# EAGLE board gpn-badge (EAGLE 8.2.0)
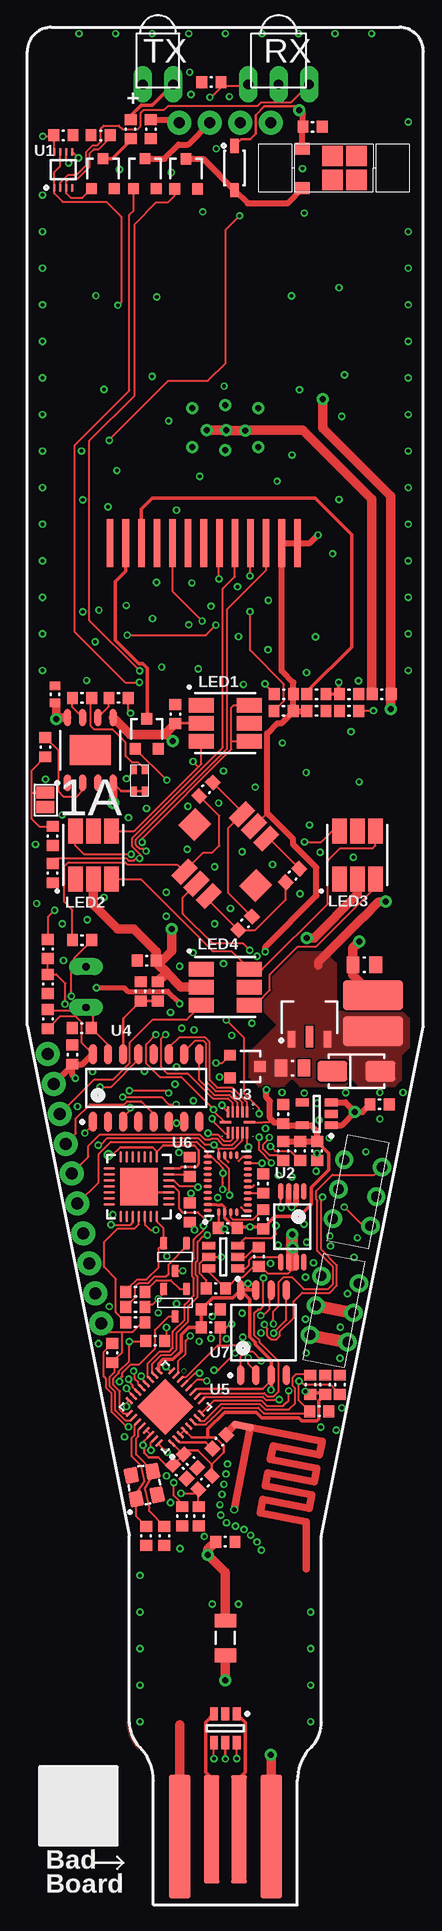
[diagram p0: board, top side]
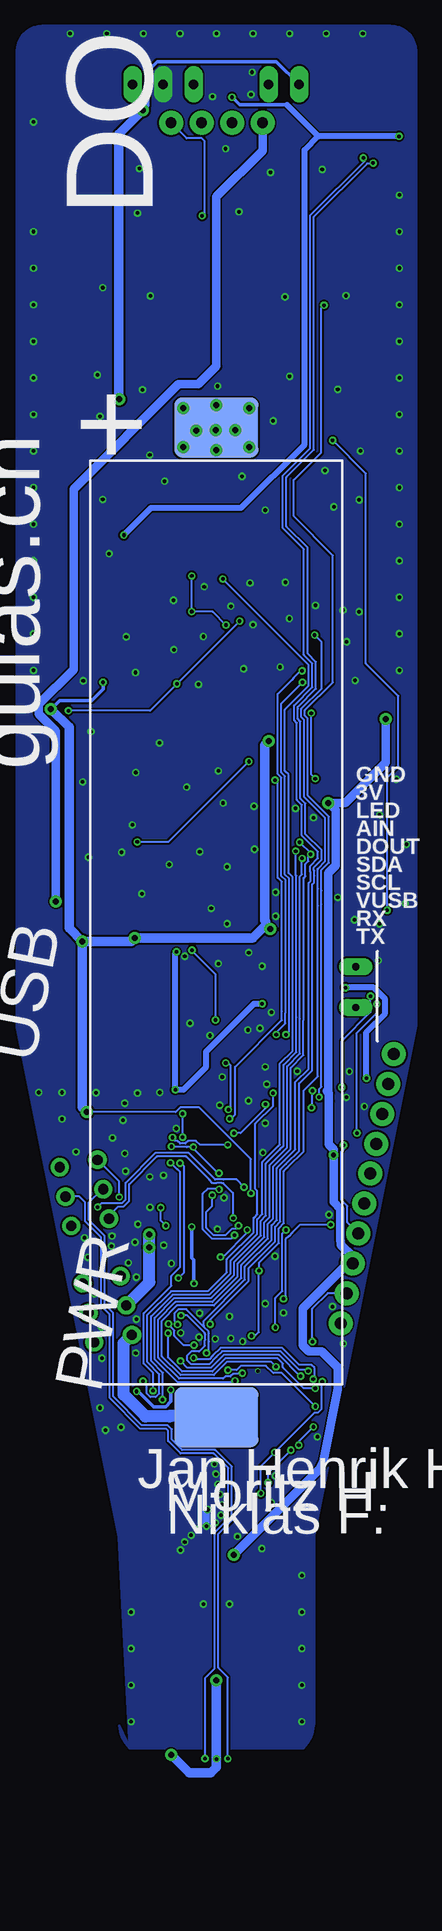
[diagram p1: board, bottom side, seen from below]

No outline drawn. Coordinates in mm, seen from the top.
Copper layers (1*16): Top 0.035mm / dielectric 1.5mm / Bottom 0.035mm
Design rules "gpn-badge": minimum track width 6mil, minimum drill 0.35mm, track to track 6mil, track to pad 6mil, pad to pad 6mil, via to via 6mil, smd to smd 6mil, copper to edge 40mil, drill to drill 6mil, minimum pad ring 0mil, minimum via ring 0mil, stop-mask expansion 4mil, vias tented up to drill 0mil, thermal gap 10mil

## Footprints (pad centres in the part's own frame; a part is rotated, then mirrored left to right if it is on the bottom)
ESP8266_ANT_1PRIMARY = smd 1.905 x 0.635 rotated 349: 1 -0.398,5.031 | drill 0.406 pad 0.635: 2 -1.108,-1.947
18650HOLDER-SMD_1PRIMARY = smd 7 x 5: 4 0,41.25; 5 0,-41.25
JOYSTICK_1PRIMARY = smd 2 x 1.1: 3 -3.39,1.43; 4 -3.39,0; 5 -3.39,-1.43; 6 3.39,1.43; 7 3.39,0; 8 3.39,-1.43 | smd 2 x 1.9: 9 0,3.6; 10 0,-3.6
C-0603-M_1PRIMARY = smd 0.9 x 1: 1 -0.8,0; 2 0.8,0
C-0603-M_3PRIMARY = smd 0.9 x 1: 1 -0.8,0; 2 0.8,0
C-0603-M_5PRIMARY = smd 0.9 x 1: 1 -0.8,0; 2 0.8,0
C-0603-M_4PRIMARY = smd 0.9 x 1: 1 -0.8,0; 2 0.8,0
C-0603-M_2PRIMARY = smd 0.9 x 1: 1 -0.8,0; 2 0.8,0
C-0603-H_1PRIMARY = smd 0.7 x 0.9: 1 -0.7,0; 2 0.7,0
C-0805-M_1PRIMARY = smd 1.05 x 1.4: 1 -0.95,0; 2 0.95,0
SOD123_1PRIMARY = smd 1.2 x 0.7: 1 -1.85,0; 2 1.85,0
DIODE-SMA_1PRIMARY = smd 1.7 x 2.5: 1 0,2; 2 0,-2
P:EX79Y79D391 = drill 1 pad 2: 1 0,0
EF59X39TOP1 = smd 1.5 x 1: 0 0,0
EF51X354TOP1 = smd 1.3 x 9: 0 0,0
EF70X406TOP1 = smd 1.778 x 10.3: 0 0,0
TL1838_1PRIMARY = drill 0.8 pad 1.524 long: 1 -2.54,0.254; 2 0,0.254; 3 2.54,0.254
SOT23-6_1PRIMARY = smd 1.1 x 0.65: 1 -1.2,0.95; 2 -1.2,0; 3 -1.2,-0.95; 4 1.2,-0.95; 5 1.2,0; 6 1.2,0.95
SOT89-150P409X160-3N_1PRIMARY = smd 1.4 x 0.6: 1 -1.8,1.5; 3 -1.8,-1.5 | smd 1.8 x 0.6: 2 -1.6,0
L_1PRIMARY = smd 2.5 x 5: 1 -1.5,0; 2 1.5,0
LCD_1PRIMARY = smd 0.55 x 4: 1 22.2,10; 2 20.9,10; 3 19.6,10; 4 18.3,10; 5 17,10; 6 15.7,10; 7 14.4,10; 8 13.1,10; 9 11.8,10; 10 10.5,10; 11 9.2,10; 12 7.9,10; 13 6.6,10
PLCC6_1PRIMARY = smd 2.1 x 1.2: 1 -2,1.5; 2 -2,0; 3 -2,-1.5; 4 2,-1.5; 5 2,0; 6 2,1.5
LEDDUO_1PRIMARY = smd 0.75 x 0.5: 1 2.2,1.2; 2 0.4,1.2; 3 2.2,0.3; 4 0.4,0.3
IR_LED_1PRIMARY = drill 0.8 pad 1.524 long: 1 -1.27,0.254; 2 1.27,0.254
VIBRATOR_SMD_1PRIMARY = smd 1.2 x 1: 1 8.9,0.4; 2 8.9,3.7 | smd 1.7 x 1.7: 3 4.4,3; 4 4.4,1; 5 6.4,3; 6 6.4,1
HDR1X4H_WO_SILK_1PRIMARY = drill 0.9 pad 2: 1 0,0; 2 2.54,0; 3 5.08,0; 4 7.62,0
AO-SOT23-3_V_1PRIMARY = smd 0.9 x 0.95: 1 -0.95,-1.25; 2 0.95,-1.25; 3 0,1.25
SOT23-3_1PRIMARY = smd 1 x 0.6: 2 -1.15,0.95; 3 -1.15,-0.95; 4 1.15,0
AO-SOT23-3_V_2PRIMARY = smd 0.9 x 0.95: 1 -0.95,-1.25; 2 0.95,-1.25; 3 0,1.25
SOP64P640X265-8N_1PRIMARY = smd 1.4 x 0.45: 1 -2.95,0.953; 2 -2.95,0.318; 3 -2.95,-0.318; 4 -2.95,-0.953; 5 2.95,-0.953; 6 2.95,-0.318; 7 2.95,0.318; 8 2.95,0.953
R-0603-M_1PRIMARY = smd 0.9 x 1: 1 -0.8,0; 2 0.8,0
R-0603-M_2PRIMARY = smd 0.9 x 1: 1 -0.8,0; 2 0.8,0
R-0603-M_4PRIMARY = smd 0.9 x 1: 1 -0.8,0; 2 0.8,0
LDR-5MM_1PRIMARY = drill 0.6 pad 1.397 long: 1 -1.7,0; 2 1.7,0
R-0603-M_3PRIMARY = smd 0.9 x 1: 1 -0.8,0; 2 0.8,0
R-1206-M_1PRIMARY = smd 1.15 x 1.8: 1 -1.45,0; 2 1.45,0
SWITCH_THT_1PRIMARY = drill 0.85 pad 1.524: 1 1.9,0.2; 2 4.4,0.2; 3 6.9,0.2; 4 6.9,3.4; 5 4.4,3.4; 6 1.9,3.4
DCU0008A_L_1PRIMARY = smd 0.6 x 0.25: 1 -1.5,0.75; 2 -1.5,0.25; 3 -1.5,-0.25; 4 -1.5,-0.75; 5 1.5,-0.75; 6 1.5,-0.25; 7 1.5,0.25; 8 1.5,0.75
BNO-055_1PRIMARY = smd 0.3 x 0.7: 1 -2.245,1.671; 6 -2.255,-1.671; 7 -1.755,-1.671; 8 -1.255,-1.671; 9 -0.755,-1.671; 10 -0.255,-1.671; 11 0.245,-1.671; 12 0.745,-1.671; 13 1.245,-1.671; 14 1.745,-1.671; 15 2.245,-1.671; 20 2.255,1.671; 21 1.755,1.671; 22 1.255,1.671; 23 0.755,1.671; 24 0.255,1.671; 25 -0.245,1.671; 26 -0.745,1.671; 27 -1.245,1.671; 28 -1.745,1.671 | smd 0.7 x 0.3: 2 -2.382,0.744; 3 -2.382,0.244; 4 -2.382,-0.256; 5 -2.382,-0.756; 16 2.368,-0.756; 17 2.368,-0.256; 18 2.368,0.244; 19 2.368,0.744
SON40P210X100-10N_1PRIMARY = smd 0.95 x 0.2: 1 -0.865,0.8; 2 -0.865,0.4; 3 -0.865,0; 4 -0.865,-0.4; 5 -0.865,-0.8; 7 0.865,-0.8; 8 0.865,-0.4; 9 0.865,0; 10 0.865,0.4; 11 0.865,0.8 | smd 0.2 x 0.95: 6 0,-1; 12 0,1
D0016A_M_1PRIMARY = smd 1.65 x 0.65: 1 -2.825,4.445; 2 -2.825,3.175; 3 -2.825,1.905; 4 -2.825,0.635; 5 -2.825,-0.635; 6 -2.825,-1.905; 7 -2.825,-3.175; 8 -2.825,-4.445; 9 2.825,-4.445; 10 2.825,-3.175; 11 2.825,-1.905; 12 2.825,-0.635; 13 2.825,0.635; 14 2.825,1.905; 15 2.825,3.175; 16 2.825,4.445
QFN32-5X5MM_1PRIMARY = smd 0.8 x 0.25: 1 -2.5,1.75; 2 -2.5,1.25; 3 -2.5,0.75; 4 -2.5,0.25; 5 -2.5,-0.25; 6 -2.5,-0.75; 7 -2.5,-1.25; 8 -2.5,-1.75; 17 2.5,-1.75; 18 2.5,-1.25; 19 2.5,-0.75; 20 2.5,-0.25; 21 2.5,0.25; 22 2.5,0.75; 23 2.5,1.25; 24 2.5,1.75 | smd 0.25 x 0.8: 9 -1.75,-2.5; 10 -1.25,-2.5; 11 -0.75,-2.5; 12 -0.25,-2.5; 13 0.25,-2.5; 14 0.75,-2.5; 15 1.25,-2.5; 16 1.75,-2.5; 25 1.75,2.5; 26 1.25,2.5; 27 0.75,2.5; 28 0.25,2.5; 29 -0.25,2.5; 30 -0.75,2.5; 31 -1.25,2.5; 32 -1.75,2.5 | smd 3.3 x 3.3: 33 0,0
SLAB-QFN-28-3125X3125TP_M_1PRIMARY = smd 0.95 x 0.2: 1 -2.475,1.5; 2 -2.475,1; 3 -2.475,0.5; 4 -2.475,0; 5 -2.475,-0.5; 6 -2.475,-1; 7 -2.475,-1.5; 15 2.475,-1.5; 16 2.475,-1; 17 2.475,-0.5; 18 2.475,0; 19 2.475,0.5; 20 2.475,1; 21 2.475,1.5 | smd 0.2 x 0.95: 8 -1.5,-2.475; 9 -1,-2.475; 10 -0.5,-2.475; 11 0,-2.475; 12 0.5,-2.475; 13 1,-2.475; 14 1.5,-2.475; 22 1.5,2.475; 23 1,2.475; 24 0.5,2.475; 25 0,2.475; 26 -0.5,2.475; 27 -1,2.475; 28 -1.5,2.475 | smd 3.13 x 3.13: 29 0,0
SOIC127P790X100-8N_1PRIMARY = smd 1.7 x 0.6: 1 -3.55,1.905; 2 -3.55,0.635; 3 -3.55,-0.635; 4 -3.55,-1.905; 5 3.55,-1.905; 6 3.55,-0.635; 7 3.55,0.635; 8 3.55,1.905
SOIC127P600X20_HS-9N_1PRIMARY = smd 1.45 x 0.6: 1 -2.725,1.905; 2 -2.725,0.635; 3 -2.725,-0.635; 4 -2.725,-1.905; 5 2.725,-1.905; 6 2.725,-0.635; 7 2.725,0.635; 8 2.725,1.905 | smd 2.5 x 3.4: 9 0,0
SOT23-5_1PRIMARY = smd 1.1 x 0.65: 1 -1.2,0.95; 2 -1.2,0; 3 -1.2,-0.95; 4 1.2,-0.95; 5 1.2,0.95
3225_1PRIMARY = smd 1.3 x 1.1: 1 -1,0.9; 2 1,0.9; 3 1,-0.9; 4 -1,-0.9

## Placement (x,y rotation side)
ANT1  ESP-ANTENNA  [ESP8266_ANT_1PRIMARY]  85.85,66.4 0 top
B1  18650-Holder  [18650HOLDER-SMD_1PRIMARY]  84,113.4 0 bottom
BTN1  joystick  [JOYSTICK_1PRIMARY]  84,119 45 top
C1  100n_25V  [C-0603-M_1PRIMARY]  77.45,110.21 0 top
C2  100n_25V  [C-0603-M_3PRIMARY]  91.26,179.71 180 top
C3  100n_25V  [C-0603-M_1PRIMARY]  79.83,130.76 270 top
C5  100n_25V  [C-0603-M_3PRIMARY]  91.65,94.34 90 top
C6  100n_25V  [C-0603-M_1PRIMARY]  94.31,131.02 0 top
C7  220p_50V  [C-0603-M_3PRIMARY]  93.55,74.86 90 top
C9  100n_25V  [C-0603-M_1PRIMARY]  72.04,104.58 0 top
C10  100n_25V  [C-0603-M_3PRIMARY]  87.15,91.62 270 top
C13  100n_25V  [C-0603-M_3PRIMARY]  92.31,74.86 270 top
C14  5.6p_50V  [C-0603-M_5PRIMARY]  83.5,70.1 45 top
C15  5.6p_50V  [C-0603-M_1PRIMARY]  77.4,62.26 90 top
C16  1u_10V  [C-0603-M_3PRIMARY]  84,61.78 180 top
C17  100n_25V  [C-0603-M_3PRIMARY]  81.05,93.02 270 top
C18  100n_25V  [C-0603-M_1PRIMARY]  84.2,87.91 0 top
C19  5.6p_50V  [C-0603-M_1PRIMARY]  78.92,62.26 90 top
C20  1u_10V  [C-0603-M_4PRIMARY]  88.83,97.41 270 top
C21  10u_6,3V  [C-0603-M_2PRIMARY]  81.1,68.5 135 top
C22  100n_25V  [C-0603-M_3PRIMARY]  80.2,67.6 135 top
C23  1u_10V  [C-0603-M_3PRIMARY]  82.78,81.13 180 top
C24  100n_25V  [C-0603-M_3PRIMARY]  91.59,131.02 180 top
C25  220p_50V  [C-0603-M_1PRIMARY]  81.8,63.9 90 top
C26  10u_6,3V  [C-0603-H_1PRIMARY]  69.8,132.4 270 top
C27  10u_6,3V  [C-0603-M_3PRIMARY]  94.31,132.41 180 top
C29  1u_10V  [C-0603-M_1PRIMARY]  96.85,98.22 180 top
C30  47u_6.3V  [C-0805-M_1PRIMARY]  95.58,109.86 180 top
C31  47u_6.3V  [C-0805-M_1PRIMARY]  89.59,101.25 0 top
C32  100n_25V  [C-0603-M_1PRIMARY]  70.5,179 180 top
C34  100n_25V  [C-0603-M_1PRIMARY]  82.83,183.44 0 top
C35  100n_25V  [C-0603-M_1PRIMARY]  71.25,102.36 270 top
C36  1u_10V  [C-0603-M_1PRIMARY]  77.8,179.51 90 top
D1  BAT54T1G  [SOD123_1PRIMARY]  84.76,176.28 90 top
D2  B230A-13-F  [DIODE-SMA_1PRIMARY]  94.92,100.99 270 top
D3  RB520S30T1G  [C-0603-M_3PRIMARY]  83.21,82.88 0 top
DUMMY1  [P:EX79Y79D391]  73.15,82.48 0 top
DUMMY2  [P:EX79Y79D391]  73.66,79.99 0 top
DUMMY3  [P:EX79Y79D391]  72.66,84.97 0 top
DUMMY4  [P:EX0Y0D1931]  88,162 0 top
DUMMY5  [P:EX0Y0D1931]  96,162 0 top
DUMMY6  [P:EX0Y0D1931]  96,170 0 top
DUMMY7  [P:EX0Y0D1931]  88,170 0 top
DUMMY8  [P:EX0Y0D1931]  72,162 0 top
DUMMY9  [P:EX0Y0D1931]  80,162 0 top
DUMMY10  [P:EX0Y0D1931]  80,170 0 top
DUMMY11  [P:EX0Y0D1931]  72,170 0 top
DUMMY12  [P:EX0Y0D1931]  80,58 0 top
DUMMY13  [P:EX0Y0D1931]  88,58 0 top
DUMMY14  [P:EX0Y0D1931]  88,49.95 0 top
DUMMY15  [P:EX0Y0D1931]  80,49.95 0 top
DUMMY16  [P:EX0Y0D2361]  72.5,183.5 0 top
DUMMY17  [P:EX0Y0D2361]  95.5,183.5 0 top
DUMMY18  [P:EX79Y79D391]  71.68,89.96 0 top
DUMMY19  [P:EX79Y79D391]  71.18,92.45 0 top
DUMMY20  [P:EX79Y79D391]  70.69,94.94 0 top
DUMMY21  [P:EX79Y79D391]  70.2,97.43 0 top
DUMMY22  [P:EX79Y79D391]  69.7,99.92 0 top
DUMMY23  [P:EX79Y79D391]  69.21,102.41 0 top
DUMMY24  [P:EX79Y79D391]  72.17,87.46 0 top
DUMMY25  [P:EX0Y0D1381]  97.94,176.28 0 top
DUMMY26  [P:EX0Y0D1381]  87.78,176.31 0 top
DUMMY27  [EF59X39TOP1]  69,124.2 0 top
DUMMY28  [EF59X39TOP1]  69,123 0 top
DUMMY29  [EF51X354TOP1]  85.14,37.8 0 top
DUMMY30  [EF51X354TOP1]  82.86,37.8 0 top
DUMMY31  [EF70X406TOP1]  87.81,37.2 0 top
DUMMY32  [EF70X406TOP1]  80.19,37.2 0 top
IC1  TL1838  [TL1838_1PRIMARY]  88.44,183 0 top
IC2  USBLC6-2SC6  [SOT23-6_1PRIMARY]  84,46.23 270 top
IC3  BL8530  [SOT89-150P409X160-3N_1PRIMARY]  91.01,105.46 90 top
L1  L  [L_1PRIMARY]  96.32,105.82 270 top
LCD1  LCD  [LCD_1PRIMARY]  67.8,135.01 0 top
LED1  WS2813  [PLCC6_1PRIMARY]  84,130 0 top
LED2  WS2813  [PLCC6_1PRIMARY]  73,119 90 top
LED3  WS2813  [PLCC6_1PRIMARY]  95,119 90 top
LED4  WS2813  [PLCC6_1PRIMARY]  84,108 0 top
LED5  DUO_LED  [LEDDUO_1PRIMARY]  76.07,126.54 270 top
LED6  IR_LED  [IR_LED_1PRIMARY]  78.39,183 0 top
M1  VIBRATOR  [VIBRATOR_SMD_1PRIMARY]  99.33,178.28 180 top
P1  Header_4H  [HDR1X4H_WO_SILK_1PRIMARY]  80.16,180.04 180 bottom
Q1  AO3400  [AO-SOT23-3_V_1PRIMARY]  80.72,175.8 0 top
Q2  AO3400  [AO-SOT23-3_V_1PRIMARY]  77.45,129.11 0 top
Q3  NPN_MMBT3904  [SOT23-3_1PRIMARY]  79.81,81.69 270 top
Q4  NPN_MMBT3904  [SOT23-3_1PRIMARY]  79.81,85.5 270 top
Q5  AO3400  [AO-SOT23-3_V_1PRIMARY]  73.8,175.8 0 top
Q6  AO3400  [AO-SOT23-3_V_2PRIMARY]  85.65,101.37 270 top
Q7  CEG8205  [SOP64P640X265-8N_1PRIMARY]  89.59,88.01 270 top
Q8  AO3400  [AO-SOT23-3_V_1PRIMARY]  77.3,175.8 0 top
R1  100k  [R-0603-M_1PRIMARY]  82.4,124.5 225 top
R2  100  [R-0603-M_2PRIMARY]  76.1,179.51 90 top
R3  12k  [R-0603-M_1PRIMARY]  88.88,132.41 180 top
R4  33  [R-0603-M_2PRIMARY]  91.59,132.41 0 top
R5  100k  [R-0603-M_4PRIMARY]  85.65,113.31 45 top
R6  100k  [R-0603-M_1PRIMARY]  89.6,117.3 225 top
R7  200k  [R-0603-M_1PRIMARY]  72.06,111.92 180 top
R8  100k  [R-0603-M_1PRIMARY]  91.82,72.65 180 top
R9  100k  [R-0603-M_2PRIMARY]  69.22,105.34 270 top
R10  12k  [R-0603-M_1PRIMARY]  73.61,179 0 top
R11  12k  [R-0603-M_1PRIMARY]  87.15,88.65 270 top
R12  330k  [R-0603-M_1PRIMARY]  78.39,107.65 90 top
R13  LDR  [LDR-5MM_1PRIMARY]  72.39,108 90 top
R14  330k  [R-0603-M_1PRIMARY]  69.22,111.18 90 top
R15  12k  [R-0603-M_1PRIMARY]  76.51,82.6 0 top
R16  12k  [R-0603-M_1PRIMARY]  76.51,81.33 180 top
R17  470  [R-0603-M_3PRIMARY]  78.16,78.51 179.6 top
R18  470  [R-0603-M_1PRIMARY]  76.51,80.06 0 top
R19  12k  [R-0603-M_1PRIMARY]  80.4,63.9 270 top
R20  1.2k  [R-0603-M_2PRIMARY]  82.78,79.63 180 top
R21  4k7  [R-0603-M_1PRIMARY]  88.85,131.02 180 top
R22  12k  [R-0603-M_2PRIMARY]  74.58,77.5 270 top
R23  12k  [R-0603-M_1PRIMARY]  91.09,74.86 90 top
R24  12k  [R-0603-M_1PRIMARY]  82.3,66.7 225 top
R25  12k  [R-0603-M_1PRIMARY]  69.6,117.5 90 top
R26  4k7  [R-0603-M_2PRIMARY]  90.22,94.34 270 top
R27  100  [R-0603-M_2PRIMARY]  81.05,89.21 90 top
R28  1.2k  [R-0603-M_2PRIMARY]  69,128 90 top
R29  1.2k  [R-0603-M_2PRIMARY]  69.6,120.6 90 top
R30  1.2k  [R-0603-M_1PRIMARY]  86.79,85.53 90 top
R31  0.27  [R-1206-M_1PRIMARY]  84,53.75 90 top
R32  4k7  [R-0603-M_2PRIMARY]  88.83,94.34 270 top
R33  1M  [R-0603-M_2PRIMARY]  76.94,107.65 270 top
R34  0  [R-0603-M_1PRIMARY]  97.03,132.41 0 top
R35  470  [R-0603-M_1PRIMARY]  72.06,132.11 0 top
R36  470  [R-0603-M_1PRIMARY]  75.1,132.1 0 top
R37  1M  [R-0603-M_2PRIMARY]  69.22,108.26 90 top
SW1  SWITCH_2P2T  [SWITCH_THT_1PRIMARY]  92.17,85.82 259 top
SW2  SWITCH_2P2T  [SWITCH_THT_1PRIMARY]  95.94,86.18 79 top
U1  74LVC2G125  [DCU0008A_L_1PRIMARY]  70.49,176.13 90 top
U2  BNO-055_I2C  [BNO-055_1PRIMARY]  84.2,91.62 90 top
U3  PCA9571  [SON40P210X100-10N_1PRIMARY]  85.02,96.73 270 top
U4  CD4051BM  [D0016A_M_1PRIMARY]  77.4,99.6 90 top
U5  ESP8266EX  [QFN32-5X5MM_1PRIMARY]  79,73 135 top
U6  CP2102-GM  [SLAB-QFN-28-3125X3125TP_M_1PRIMARY]  76.8,91.38 180 top
U7  W25Q64  [SOIC127P790X100-8N_1PRIMARY]  87.17,79.2 90 top
U8  TP4056  [SOIC127P600X20_HS-9N_1PRIMARY]  72.75,127.75 90 top
U9  DW01A  [SOT23-6_1PRIMARY]  83.82,85.5 180 top
U10  MIC5501-3.3V  [SOT23-5_1PRIMARY]  91.62,97.44 180 top
Y1  26MHz  [3225_1PRIMARY]  77.25,66.5 101 top

## Library data of the parts
ANT1 B1 BTN1 C1-C3 C5-C7 C9 C10 C13-C27 C29-C32 C34-C36 D1-D3 DUMMY1-DUMMY32 IC1-IC3 L1 LCD1 LED1-LED6 M1 P1 Q1-Q8 R1-R37 SW1 SW2 U1-U10 Y1 = gpn-badge

## Nets
ADC: C7.1 R8.2 U4.3
ALKSNS: R14.1 R37.2 U4.1
BATLVL: R12.1 R33.2 U4.14
EN: R23.2
ESP_RX: R17.2
ESP_TX: R18.2 R22.2
GND: ANT1.2 IC1.2
HSPI_CS_GPIO_15: R25.2
IN1: U4.5
IR_EN: U1.1 U1.7 U3.8
JOYSTK: R7.1 U4.13
LCD_LED: Q2.1 U3.7
LCD_RES: C6.2 LCD1.9 R3.2
MQ3_EN: Q6.1 Q8.1 U3.6
NETANT1_1: ANT1.1 C14.2
NETB1_1: R34.1
NETB1_2: SW1.3 SW1.4
NETC10_2: C10.2 U2.9
NETC14_1: C14.1
NETC15_2: C15.2 Y1.1
NETC19_2: C19.2 Y1.3
NETC31_1: C31.1 IC3.1 Q6.3
NETD1_1: D1.1 M1.2 Q1.3
NETD2_1: D2.1 IC3.3 L1.2
NETD3_1: D3.1 R27.1 U9.5
NETD3_2: D3.2 Q7.6 Q7.7 R30.1 SW1.2 SW1.5 U9.6
NETIC1_3: IC1.3 U1.2
NETJ2_1: R28.1 R29.2
NETLCD1_11: LCD1.11 R4.1
NETLCD1_12: LCD1.12 Q2.3
NETLED5_2: LED5.2 R35.2
NETLED5_4: LED5.4 R36.2
NETLED6_2: LED6.2 R2.1
NETQ3_1: Q3.2 R15.2
NETQ3_2: Q3.3
NETQ4_1: Q4.2 R16.2
NETQ5_1: Q5.1 R10.2 U1.3
NETQ5_3: Q5.3 R2.2
NETQ7_4: Q7.4 U9.3
NETQ7_5: Q7.5 U9.1
NETR11_1: R11.1 U2.4
NETR19_1: R19.1
NETR28_2: R28.2 U8.2
NETR30_2: R30.2 U9.2
NETR35_1: R35.1 U8.7
NETR36_1: R36.1 U8.6
NETU3_1: U3.1 U4.11
NETU3_2: U3.2 U4.10
NETU3_3: U3.3 U4.9
NETU5_20: U7.1
NETU5_21: U7.6
NETU5_22: U7.2
NETU5_23: U7.5
NRST: C25.2 Q3.4 R24.2
OUT1: U3.9
PCB_N: IC2.1
PCB_P: IC2.3
SCL: U3.10
SDA: U3.11
SER_N: SW2.1
SER_P: SW2.6
SW_N: IC2.6 SW2.2
SW_P: IC2.4 SW2.5
USB_N: R20.1 SW2.3 U1.6
USB_P: SW2.4 U1.5
VBAT: D1.2 LED6.1 M1.1
VBUS: LED5.1 LED5.3 U8.4 U8.8
VIBRATOR: Q1.1 U3.4
VUSB: IC2.5 R31.1

## Tracks (layer width: path | path; a pad name or v marks a point on that pad's centre or on a via)
5V  (via drill 0.5 pad 1)
  Top 0.5: 80.17,180.04 79.9,180.31 77.8,180.31
  Top 0.7: v97.39,115.14 96.8,115.14 95.48,113.82 95.48,113.84 91.75,110.11 91.75,109.81
  Bottom 0.7: v97.39,115.14 97.39,129.35 98.79,130.75 98.79,131.58 95.9,134.48 95.9,149.52 87.17,158.25 85.5,158.25 84,159.75 84,173.87 80.17,177.7 80.17,180.04
  pour Top (no thermals): 89.62,100.38 90.25,99.75 93.96,99.75 94.49,100.28 94.49,101.78 93.91,102.36 92.1,102.36 91.75,102.72 91.75,104.58 93.22,106.05 93.22,109.98 92.33,110.87 89.54,110.87 87.71,109.04 87.71,107.74 87.11,107.14 87.11,106.09 88.27,104.93 89.95,104.93 90.3,104.58 90.3,102.8 89.62,102.12
ADC  (via drill 0.3 pad 0.6)
  Top 0.15: C7.1 93.55,74.08 92.74,74.89 90.52,74.89 90.25,75.16 v90.13,75.16 v90.12,75.16 90.11,75.15 90.11,73.56 R8.2 90.86,72.49 87.2,72.49 86.75,72.94 83.78,72.94 82.85,72.01 82.38,71.53 81.63,71.53 81.61,71.55 | 93.14,73.7 93.5,74.06 | v79.28,99.17 79.07,99.37 v76,99.37 | v76.08,97.95 76.08,97.77 75.49,97.18 U4.3
  Bottom 0.15: v79.28,99.17 79.28,98.1 80.75,96.63 80.75,91.17 80.61,91.03 80.61,89.08 80.91,88.77 80.91,87.54 83.13,85.33 83.13,84.24 84.71,82.65 87.79,82.65 89.76,80.68 89.76,76.74 88.76,75.73 88.76,74.13 89.07,73.83 89.5,73.83 89.81,74.13 89.81,74.84 v90.13,75.16 | v76,99.37 76,98.02 v76.08,97.95
ALKSNS  (via drill 0.3 pad 0.6)
  Top 0.15: R14.1 R37.2 69.92,109.06 70.67,108.31 70.64,108.28 v70.64,106.58 | v72.29,95.84 72.95,96.5 U4.1
  Bottom 0.15: v72.29,95.84 72.29,104.19 70.64,105.85 v70.64,106.58
BATLVL
  Top 0.2: 75.49,102.17 U4.14 75.49,105.4 R33.2 R12.1
BNO_INT  (via drill 0.3 pad 0.6)
  Top 0.15: 85.87,93.36 85.92,93.36 | 85.92,93.36 87.01,93.36 v87.05,93.32 | 81.65,73.88 81.91,74.14 87.25,74.14 87.49,73.9 88.03,73.9 88.44,74.32 88.44,76.79 86.86,78.37 86.86,78.47 86.85,78.48 86.85,78.56 86.42,78.98 86.42,79.23 86.42,80.84 86.73,81.15 86.94,81.15 87.17,81.38 v87.17,83.75 | 85.87,93.31 85.92,93.36
  Bottom 0.15: v87.05,93.32 86.97,93.32 86.7,93.05 86.7,84.22 v87.17,83.75
EN
  Top 0.15: 81.65,72.12 81.93,71.83 82.25,71.83 82.55,72.13 82.55,72.14 83.66,73.25 86.87,73.25 87.33,72.79 89.28,72.79 89.81,73.31 89.81,74.57 89.61,74.77 89.61,75.46 89.9,75.76 91.09,75.76
ESP_RX  (via drill 0.3 pad 0.6)
  Top 0.15: 76,72.47 75.49,72.47 75.21,72.75 75.21,74.3 74.66,74.85 74.66,75.37 75.12,75.83 75.12,75.95 75.99,76.82 v75.99,78.45 77.04,78.45 77.36,78.77
  Bottom 0.15: v75.99,78.45 75.94,78.45 76,78.51 76,81.21 74.73,82.48 73.15,82.48
ESP_TX
  Top 0.15: 76.35,72.12 76.1,71.87 75.67,71.87 74.82,72.72 74.82,74.27 74.36,74.73 74.36,75.5 74.78,75.92 74.78,76.95 75.39,77.56 75.39,79.25 | 73.66,79.71 73.66,79.99 74.4,79.25 75.39,79.25 | 75.39,79.25 76.27,79.25 77.31,80.29
GND  (via drill 0.3 pad 0.4, 0.3 pad 0.6)
  Top 0.2: 84.22,97.59 84.22,97.6 83.72,98.09 v83.72,98.15 | 79.28,90.88 77.3,90.88 76.8,91.38 | 83.19,87.7 83.46,87.97 83.46,89.23 | 86.14,89.36 85.61,89.36 85.33,89.64 | 85.11,93.51 85.47,93.86 85.87,93.86 | 84.26,93.42 83.96,93.72 83.96,93.98 | 86.36,91.48 86.24,91.36 85.87,91.36
  Top 0.5: 89.27,90.96 89.27,89.98 89.35,89.91 89.35,89.83 v89.54,89.64 89.91,90.01 89.91,90.96
  Top 0.8: 80.19,37.11 80.19,46.51
  Bottom 0.635: ANT1.2 84.84,64.36 v84.84,63.07
  other vias: 80.88,123.07 86.64,110.57 91.9,119.23 93.7,72.93 93.58,79.66 92.71,87.25 90.78,86.75 75.59,70.51 79.07,113.9 79.07,115.9 74.96,151.06 72.01,152.68 72.11,148.62 72.11,139.27 73.15,136.78 73.89,115.47 70.51,110.21 70.41,113.29 72.49,113.62 68.28,114.96 68.18,119.89 70.4,122.35 75.92,122.13 83.44,123.35 83.11,118.04 84.43,114.56 83.11,113.29 90.22,115.78 85.4,119.28 87.94,118.22 94.67,118.83 95.15,125.1 90.73,125.89 94.46,129.29 91.01,121.52 88.75,128.35 86.49,124.67 83.85,126.01 72.44,133.56 78.69,134.67 81.74,134.52 85.5,133.23 87.56,136.12 85.09,137.21 91.52,137.19 90.76,134.22 92.94,144.12 81.21,141.69 82.81,139.75 80.95,138.21 77.93,138.71 73.46,139.42 74.22,148.04 79.94,147.76 93.93,159.03 93.7,155.58 89.56,152.35 81.87,150.58 90.17,157.79 83.9,158.09 79.28,155.2 73.89,157.81 77.9,158.91 73.2,165.64 78.28,165.54 89.51,165.61 93.47,166.3 90.58,172.52 90.43,176.23 81.03,184.26 81.13,182.4 84.33,182.22 75.19,176.15 82.12,172.62 79.5,175.9 83.24,177.88 95,87.1 94.72,85.47 94.19,82.45 91.65,94.14 88.42,92.31 89.56,92.18 91.57,92.66 95.71,94.26 98.81,99.22 96.88,97.01 96.88,99.22 94.03,99.19 91.65,98.33 90.58,99.17 88.72,99.22 83.52,100.51 84.53,103.97 80.19,109.73 79.94,101.35 79.43,105.9 81.38,104.42 80.37,104.58 72.93,100.97 77.27,100.99 79.94,96.65 80.14,94.21 74.63,89.03 73.43,78.29 78.41,80.85 79.94,81.61 82.81,78.72 93.25,71.07 91.95,71.33 86.64,61.75 86.11,62.31 84.18,68.25 84.05,67.42 83.87,66.55 83.72,65.71 83.54,64.85 83.62,63.99 84.1,63.35 81.31,110.88 83.85,109.96 86.21,104.98 71.68,98.05 73.18,98.81 79.81,99.9 81.33,98.53 92.76,86.41 91.34,85.02 90.55,88.24 83.36,90.45 83.92,87.84 69.01,125.33 87.58,140.24 85.02,141.38 78.26,141.73 88.32,150.17 93.47,148.64 95.1,133.53 79.43,65.03 80.83,119.48 80.22,61.19 82.91,56.57 85.09,56.57 87,61.07 79.1,67.26 99.24,180.11 74.86,187.48 71.81,187.48 96.19,187.48 93.14,187.48 90.1,187.48 87.05,187.48 84,187.48 80.95,187.48 77.9,187.48 99.24,134.39 99.24,137.44 99.24,140.49 99.24,143.54 99.24,146.59 99.24,149.63 99.24,152.68 99.24,155.73 99.24,158.78 99.24,161.83 99.24,164.87 99.24,167.92 99.24,170.97 68.76,164.87 68.76,167.92 68.76,170.97 68.76,174.02 68.76,149.63 68.76,152.68 68.76,155.73 68.76,158.78 68.76,161.83 68.76,134.39 68.76,137.44 68.76,140.49 68.76,143.54 68.76,146.59 91.11,46.76 91.11,49.81 91.11,52.86 91.11,55.91 76.89,58.96 76.89,55.91 76.89,52.86 76.89,49.81 76.89,46.76 80.55,76 79.12,85.58 74.33,81.38 90.68,83.82 93.55,77.07 81.82,78.46 85.4,80.83 90.73,77.5 86.97,79.17 82.91,80.55 85.45,78.83 84.1,78.68 90.68,80.32 85.55,62.79 82.25,62.21 91.8,96.91 92.66,95.43 75.75,139.81 77.42,122.89 87.76,84.97 87.35,96.22 88.39,86.49
  pour Top (no thermals): 76.76,44.56 76.42,44.96 76.16,45.42 75.98,45.92 75.88,46.44 75.87,46.63
  pour Bottom (no thermals): 76.76,44.56 76.42,44.96 76.16,45.42 75.98,45.92 75.88,46.44 75.87,46.63 75.87,46.63 75.87,62.29 67.37,104.8 67.37,104.78 67.37,104.8 67.37,186 67.4,186.37 67.5,186.73 67.66,187.06 67.87,187.37 68.13,187.63 68.44,187.84 68.77,188 69.13,188.1 69.5,188.13 98.5,188.13 98.87,188.1 99.23,188 99.56,187.84 99.87,187.63 100.13,187.37 100.34,187.06 100.5,186.73 100.6,186.37 100.63,186 100.63,186 100.62,104.67 100.63,104.7 100.62,104.67 92.13,62.19 91.24,44.56 91.58,44.97 91.84,45.42 92.02,45.92 92.12,46.44 91.24,44.56
GPIO0  (via drill 0.3 pad 0.6)
  Top 0.15: v83.21,138.18 82.37,137.34 v75.82,137.34 | 88.05,131.02 88.88,131.84 88.88,133.25 86.06,136.07 v86.06,139.3 | v86.06,142.27 86.06,144.96 86.1,145 | v81.08,78.92 80.69,78.53 80.69,77.44 80.08,76.83 80.08,75.84 79.88,75.65 | 79.81,84.35 v80.45,84.35
  Bottom 0.15: v75.82,137.34 75.23,136.75 75.23,132.89 76.93,131.2 76.93,130.5 76.7,130.27 76.7,123.85 74.94,122.09 74.94,118.49 75.58,117.86 75.58,117.85 75.55,117.83 75.55,116.18 75.57,116.17 75.57,114.78 75.55,114.76 75.55,100.56 76.74,99.38 76.74,94.31 78.09,92.95 78.1,92.95 78.38,92.67 78.38,88.33 78.81,87.9 78.81,86.67 80.45,85.03 v80.45,84.35 80.46,84.34 80.46,79.26 80.8,78.92 v81.08,78.92 | v83.21,138.18 84.33,139.3 v86.06,139.3 v86.06,142.27
HSPI_CLK  (via drill 0.3 pad 0.6)
  Top 0.15: v88.5,73.61 88.47,73.61 88.32,73.77 88.15,73.6 87.37,73.6 87.12,73.84 82.32,73.84 82,73.53 | v83.47,142.01 83.47,144.97 83.5,145
  Bottom 0.15: v88.5,73.61 88.46,73.65 88.46,75.86 89.45,76.85 89.45,80.57 87.67,82.35 84.59,82.35 82.83,84.11 82.83,85.2 80.61,87.42 80.61,88.65 80.18,89.08 80.18,93.42 78.84,94.75 78.71,94.88 78.71,101.63 77.65,102.7 77.65,105.6 77.65,117.16 78,117.5 78,125.71 78.3,126.01 78.3,131.13 76.31,133.12 76.31,134.86 v83.47,142.01
HSPI_CS_GPIO_15  (via drill 0.3 pad 0.6)
  Top 0.15: 76.76,119.21 76.24,119.73 76.24,120.42 83.8,127.97 83.8,141.2 84.8,142.2 84.8,145 | 76.76,119.21 | v81.84,75.82 81.47,75.82 80.59,74.94 | 69.4,118.3 69.85,118.75 75.73,118.75 75.93,118.55 76.37,118.55 76.68,118.86 76.73,118.86 v76.86,118.72 77.05,118.91 76.76,119.21
  Bottom 0.15: v76.86,118.72 76.89,118.7 76.89,117.4 77.05,117.24 77.05,105.36 77.05,105.35 77.05,102.45 78.11,101.39 78.11,94.63 78.59,94.15 79.58,93.17 79.58,88.83 80.01,88.4 80.01,87.17 82.23,84.95 82.23,83.87 84.34,81.75 87.42,81.75 88.85,80.32 88.85,77.1 87.12,75.37 83.45,75.37 83.27,75.55 82.83,75.55 82.61,75.78 82.21,75.78 82.14,75.84 81.86,75.84 v81.84,75.82
HSPI_MOSI  (via drill 0.3 pad 0.6)
  Top 0.15: v77.4,119.33 77.19,119.54 76.85,119.54 76.54,119.85 76.54,120.29 84.15,127.9 84.15,139.5 87.4,142.75 87.4,145 | 80.94,74.59 81.65,75.3 82.56,75.3 v82.45,75.19 v82.45,75.18
  Bottom 0.15: v77.4,119.33 77.4,117.33 77.35,117.28 77.35,105.48 77.35,102.57 78.41,101.51 78.41,94.75 78.72,94.45 79.88,93.29 79.88,88.96 80.31,88.52 80.31,87.3 82.53,85.08 82.53,83.99 84.47,82.05 87.54,82.05 89.15,80.44 89.15,76.97 87.24,75.07 82.56,75.07 v82.45,75.18
IN1
  Top 0.15: 70.69,94.94 71.55,95.8 71.55,97.06 72.72,98.22 75.57,98.22 75.82,98.47 76.97,98.47 78.03,97.41 U4.5 78.03,96.52
IR_EN  (via drill 0.3 pad 0.6)
  Top 0.15: v79.91,98.23 79.3,98.23 78.69,98.83 | 78.69,98.83 | v75.44,98.83 78.69,98.83 | U3.8 84.62,95.33 84.44,95.16 83.89,95.16 83.89,95.19 83.37,95.71 82.55,95.71 | U1.7 70.24,176.41 69.74,175.91 U1.1 69.74,174.16 70.44,173.46 74.07,173.46 75.32,172.21 75.31,172.21 75.36,172.16 75.36,165.16 v75.04,164.83 | 82.47,95.63 82.55,95.71 | 82.55,95.71 v82.55,95.83
  Bottom 0.15: v75.44,98.83 75.44,99.49 75.25,99.68 75.25,114.89 75.27,114.9 75.27,116.04 75.25,116.06 75.25,117.76 74.64,118.37 74.64,122.22 76.4,123.98 76.4,130.4 76.63,130.62 76.63,131.08 74.3,133.41 74.3,143.99 77.57,147.26 77.57,150.27 75.29,152.56 75.29,164.58 v75.04,164.83 | v79.91,98.23 79.91,97.91 82,95.83 v82.55,95.83
JOYSTK  (via drill 0.3 pad 0.6)
  Top 0.15: R7.1 72.86,111.88 71.43,110.44 71.43,110.35 71.17,110.09 v71.17,107.24 | v73.56,99.65 73.59,99.67 74.47,99.67 76.76,101.96 U4.13
  Bottom 0.15: v73.56,99.65 73.56,103.53 71.17,105.92 v71.17,107.24
LCD_LED  (via drill 0.3 pad 0.6)
  Top 0.15: v82.9,97.03 82.9,96.9 83.99,95.81 84.22,95.81 | v79.12,125.25 79.11,125.25 Q2.1
  Bottom 0.15: v82.9,97.03 82.81,97.03 82.45,97.39 82.45,101.36 78.55,105.26 78.55,105.97 78.55,105.98 78.55,116.78 78.89,117.13 78.89,125.25 v79.12,125.25
LCD_RES  (via drill 0.3 pad 0.6)
  Top 0.15: v96.34,131.04 95.14,131.04 C6.2 | v87.3,133.28 88.08,132.5 R3.2 | LCD1.9 79.6,140.98 v82.07,138.51
  Bottom 0.15: v82.07,138.51 v87.3,133.28 89.54,131.04 v96.34,131.04
LDRSNS
  Top 0.15: 69.22,106.14 69.3,106.06 72.76,106.06 73,106.3 73,104.74 72.84,104.58 74.22,103.19 74.22,102.42
MQ3  (via drill 0.3 pad 0.6)
  Top 0.15: v69.78,114.41 69.24,113.87 69.24,111.98 | v74.32,153.57 74.27,153.57 79.25,158.55 82.55,158.55 84.03,160.02 84.03,171.12 v85.19,172.29
  Bottom 0.15: v69.78,114.41 69.78,125.48 68.84,126.42 68.84,132.26 71.55,134.98 71.55,150.8 v74.32,153.57 | v85.19,172.29 84.99,172.5 84.99,178.51 85.22,178.74 86.49,178.74 87.78,180.04
MQ3_EN  (via drill 0.3 pad 0.6)
  Top 0.15: v76.84,133.4 75.64,133.4 71.45,137.6 71.45,153.19 76,157.74 76,172.37 76.35,172.72 Q8.1 | v78.21,104.04 77.4,103.23 77.4,101.66 78.54,100.51 80.31,100.51 83.02,97.79 v83.01,97.79 83.01,97.68 83.99,96.7 | v83.22,101.68 83.75,101.68 Q6.1
  Bottom 0.15: v83.01,97.79 82.83,97.97 82.83,101.48 83.03,101.68 v83.22,101.68 83.39,101.84 | v78.21,104.04 77.95,104.3 77.95,105.72 77.95,105.73 77.95,117.03 78.3,117.38 78.3,125.59 78.59,125.89 78.59,131.65 v76.84,133.4 | v78.2,104.04
NETANT1_1
  Top 0.2: 84.84,71.54 85.37,71.54
  Top 0.635: 84.17,70.87 84.84,71.54
NETB1_1  (via drill 0.5 pad 1)
  Top 0.8: v82.45,154.44 82.48,154.41 v84.08,154.41 84.1,154.38 v85.68,154.38 85.68,154.41 90.45,154.41 96.18,148.68 96.18,132.41
  other vias: 86.75,153 81.25,153 84,152.75 84,156.5 86.75,156.25 81.25,156.25
NETB1_2
  Top 1: SW1.3 SW1.4
  Bottom 1: SW1.3 91.73,78.33 91.73,74.03 89.91,72.21 87.92,72.21 87.86,72.27 84.12,72.27 84,72.15
NETBTN1_1
  Top 0.15: 71.26,111.92 71.26,114.42 70.56,115.12 70.56,118.04 70.92,118.39 75.67,118.39 75.86,118.2 80.01,118.2 80.59,117.61 82.18,119.2 82.9,119.2 83.5,119.8 83.5,122.27 81.83,123.93
NETBTN1_3
  Top 0.15: 89.03,116.73 89.03,115.3 86.48,112.75 85.08,112.75 82.61,115.22 82.61,115.59
NETBTN1_4
  Top 0.15: 86.22,113.88 84.25,115.84 84.25,121.28 85.39,122.41 85.39,122.64 82.97,125.07
NETBTN1_6
  Top 0.15: 90.17,117.87 87.64,120.39 87.41,120.39
NETC10_2
  Top 0.15: 85.87,90.81 85.88,90.82 | U2.9 87.11,90.86 C10.2
NETC14_1
  Top 0.15: 79.88,70.35 80.13,70.1
  Top 0.2: 82.83,69.83 82.57,69.83 82.35,70.05 80.18,70.05 80.13,70.1
NETC15_2
  Top 0.15: 76.7,71.76 76.45,71.51 76.45,70.68 76.2,70.44 76.2,68.89 76.95,68.14 77.23,66.76 76.76,66.02 76.79,65.89 Y1.1 76.56,63.9 C15.2
NETC17_2
  Top 0.15: 79.28,92.38 80.63,92.38
NETC19_2
  Top 0.15: 77.06,71.41 76.75,71.1 76.75,70.56 76.56,70.37 76.56,69.04 Y1.3 78.01,67.36 77.28,66.18 77.65,64.54 77.65,64.33 C19.2
NETC31_1
  pour Top (no thermals): 89.89,104.86 90.22,104.53 90.22,102.77 89.49,102.04 89.49,100.39 88.85,99.75 86.79,99.75 86.03,100.51 86.03,102.54 88.34,104.86
NETD1_1
  Top 0.5: M1.2 89.18,173.33 85.86,173.33 D1.1 82.14,177.05 Q1.3
NETD2_1
  pour Top (no thermals): 93.22,105.95 98.73,105.95 99.29,105.39 99.29,102.95 98.63,102.29 98.63,100.26 98.12,99.75 95.18,99.75 94.49,100.43 94.49,101.78 93.91,102.36 92.1,102.36 91.77,102.69 91.77,104.5
NETD3_1  (via drill 0.3 pad 0.6)
  Top 0.15: 81.33,88.79 81.26,88.71 81.26,88.58 81.38,88.46 81.23,88.31 81.44,88.1 v81.44,87.76 | v83.67,85.5 82.67,85.5 82.65,85.47 U9.5 82.38,85.5 81.85,84.97 81.85,84.13 82.41,83.57 D3.1
  Bottom 0.15: v81.44,87.76 81.44,87.53 83.49,85.47 83.52,85.5 v83.67,85.5
NETD3_2  (via drill 0.5 pad 1)
  Top 0.15: 89.59,84.81 89.59,84.48 89.23,84.12 87.55,84.12 86.67,85 85.49,83.83 85.05,83.83 84.11,82.88 D3.2 82.62,84.28 U9.6
  Top 1: 89.59,84.81 v89.59,87.38 | SW1.2 SW1.5
  Bottom 1: v89.59,87.38 89.59,83.4 SW1.2
  other vias: 89.61,86.31
NETIC1_3
  Top 0.15: U1.2 70.24,175.06 70.89,175.72 71.6,175.72 72.4,176.51 72.4,177.62 72.93,178.16 73.33,178.16 73.64,178.46 73.64,179.58 73.86,179.81 75.14,179.81 75.44,179.51 76.69,179.51 76.94,179.76 76.94,180.88 77.19,181.13 78.89,181.13 79.22,181.46 86.7,181.46 86.98,181.74 89.47,181.74 IC1.3
NETJ2_1
  Top 0.15: 67.87,124.2 69,124.2 | R28.1 67.87,126.07 67.87,124.2 | 67.87,124.2 67.87,122.03 68.5,121.4 69.4,121.4
NETLCD1_11
  Top 0.3: LCD1.11 77,147.84 77.9,148.75 91.49,148.75 94.54,145.7 94.54,136.36 90.92,132.74 90.92,132.41
NETLCD1_12
  Top 0.3: LCD1.12 75.7,142.68 74.83,141.81 74.83,136.93 76.79,134.97 77.11,134.97 77.5,134.58 77.5,130.41 Q2.3
NETLED1_3  (via drill 0.3 pad 0.6)
  Top 0.15: v90.6,120.1 92,120.1 92.9,121 93.5,121 | 81.8,126.4 81.7,126.4 v81.3,126.8 | 74.5,121 76.4,121 81.8,126.4 | 81.8,126.4 82,126.6 82,128.5
  Bottom 0.15: v81.3,126.8 88,120.1 v90.6,120.1
NETLED2_3
  Top 0.15: 74.5,117 76.94,117 82.94,111 84.5,111 86,109.5 87.09,109.5 92.53,114.94 92.53,118.53 93.59,119.59 96.29,119.59 96.5,119.8 96.5,121
NETLED3_3
  Top 0.15: 96.5,117 96.29,117 96.29,116.11 91.56,111.38 90.01,111.38 87.71,109.07 87.71,107.74 86.7,106.73 86,106.73 86,106.5
NETLED5_2
  Top 0.15: R35.2 72.8,132.04 72.8,129.75 73.05,129.49 74.58,129.49 75.69,128.37 75.69,127.26 76.21,126.74 76.71,126.74 77.27,126.18 LED5.2
NETLED5_4  (via drill 0.3 pad 0.6)
  Top 0.15: R36.2 75.9,131.04 v76.1,130.84 | v75.77,125.38 76.37,125.98 LED5.4
  Bottom 0.15: v76.1,130.84 76.1,125.71 v75.77,125.38
NETLED6_2
  Top 0.3: 76.02,180.53 77,181.51 77.91,181.51 LED6.2
NETP1_2
  Top 0.5: 77.3,177.05 78.93,177.05 80.11,178.24 80.9,178.24 82.7,180.04
NETQ3_1
  Top 0.15: Q3.2 80.18,82.84 79.46,83.56 78.25,83.56 77.52,82.83 77.31,82.83
NETQ3_2  (via drill 0.3 pad 0.6)
  Top 0.15: 76.3,88.87 76.3,88.37 76.11,88.17 74.38,88.17 74.4,88.19 v74.47,88.19 | v78.41,82.02 77.95,81.56 77.31,81.56 | 78.43,82.03 79.06,82.66
  Bottom 0.15: v74.47,88.19 77.04,88.19 77.68,87.55 77.68,87.54 77.99,87.23 78,87.23 78.21,87.02 78.21,82.22 v78.41,82.02
NETQ4_1
  Top 0.15: R16.2 76.51,82.13 76.51,83.07 76.76,83.33 77.59,83.33 78.13,83.86 79.05,83.86 79.28,84.1 79.28,84.9 80.76,86.37 Q4.2
NETQ4_2
  Top 0.15: 78.31,88.43 78.86,87.89 78.86,86.65 78.43,86.22 78.43,84.63 77.43,83.63 76.64,83.63 75.97,82.95 75.97,82.83 75.71,82.83
NETQ5_1
  Top 0.15: R10.2 74.41,178.81 73.46,177.86 73.06,177.86 72.7,177.5 72.7,176.39 71.72,175.42 71.01,175.42 70.74,175.14 U1.3 70.74,174.18 71.12,173.79 72.09,173.79 Q5.1
NETQ5_3
  Top 0.3: Q5.3 74.58,177.05 76.02,178.49 76.02,178.93
NETQ7_4  (via drill 0.3 pad 0.6)
  Top 0.15: v88.65,89.61 88.64,89.63 Q7.4 | 85.36,86.45 U9.3 85.67,87.1 87.9,87.1 88.22,87.42 88.22,87.9 88.43,88.12 v88.22,88.12
  Bottom 0.15: v88.22,88.12 88.65,88.55 v88.65,89.61
NETQ7_5
  Top 0.15: U9.1 85.68,84.55 85.98,84.85 85.98,85.25 86.26,85.53 88.42,85.53 88.64,85.32 Q7.5
NETR11_1
  Top 0.15: U2.4 84.46,88.79 84.61,88.64 86.34,88.64 R11.1
NETR17_1  (via drill 0.3 pad 0.6)
  Top 0.15: v78.21,87.76 77.73,87.76 77.31,88.17 77.31,88.43 | 78.96,78.51 79.1,78.65 v79.1,79.63 | 79.14,78.47 79.14,78.86
  Bottom 0.15: v78.21,87.76 78.51,87.46 78.51,82.66 79.1,82.08 v79.1,79.63
NETR18_1
  Top 0.15: 76.8,88.87 76.8,88.23 76.44,87.88 75.02,87.88 73.89,86.74 73.89,84.66 74.88,83.67 74.88,80.89 75.71,80.06
NETR19_1  (via drill 0.3 pad 0.6)
  Top 0.15: R19.1 80.4,64.92 79.7,65.62 v79.7,66.7 | v77.8,69.4 77.8,70.03 78.12,70.35
  Bottom 0.15: v79.7,66.7 79.7,67.5 v77.8,69.4
NETR28_2
  Top 0.15: U8.2 72.11,124.42 71.6,123.9 70.5,123.9 70.1,124.3 70.1,127.7 R28.2
NETR30_2
  Top 0.15: U9.2 85.7,85.5 86.53,86.33 R30.2
NETR35_1
  Top 0.15: R35.1 71.26,131.33 U8.7
NETR36_1
  Top 0.15: R36.1 74.3,131.39 U8.6 73.39,130.78
NETU3_1
  Top 0.15: 79.3,102.17 U4.11 79.3,102.95 80.19,103.84 82.27,103.84 82.69,103.42 82.69,100.25 83.32,99.62 84.59,99.62 85.82,98.4 U3.1 85.82,97.54
NETU3_2
  Top 0.15: 80.57,102.17 U4.10 80.57,102.62 81.49,103.54 82.15,103.54 82.39,103.3 82.39,100.13 83.2,99.32 84.47,99.32 85.42,98.38 U3.2 85.42,97.54
NETU3_3
  Top 0.15: 81.84,102.17 81.84,100.26 83.08,99.02 84.34,99.02 85.02,98.35 U3.3 85.02,97.54
NETU5_20  (via drill 0.3 pad 0.6)
  Top 0.15: v76.99,75.57 76.99,75.36 77.41,74.94 | v87,76.84 87,76.89 86.27,77.62 85.69,77.62 85.27,77.2 U7.1
  Bottom 0.15: v76.99,75.57 77,75.57 78.77,77.34 83.41,77.34 83.7,77.05 83.7,77.04 84.47,76.27 86.43,76.27 v87,76.84
NETU5_21  (via drill 0.3 pad 0.6)
  Top 0.15: U7.6 87.69,82.63 87.69,81.19 86.98,80.48 86.89,80.57 v86.95,80.63 | 77.06,74.59 76.74,74.91 76.74,75.07 76.47,75.35 76.47,75.89 v76.36,76
  Bottom 0.15: v76.36,76 76.45,76.09 77.1,76.09 78.65,77.64 83.53,77.64 84,77.17 84,77.16 84.59,76.57 86.12,76.57 86.43,76.87 86.43,77.31 86.12,77.62 85.45,77.62 84.96,78.11 84.96,78.57 84.92,78.61 84.92,79.04 84.96,79.08 84.96,79.17 86.42,80.63 v86.95,80.63
NETU5_22  (via drill 0.3 pad 0.6)
  Top 0.15: U7.2 86.54,75.97 85.91,76.61 v85.91,77.09 | 76.7,74.24 76.3,74.64 76.3,74.77 75.99,75.08 75.94,75.08 v75.94,75.33
  Bottom 0.15: 76.06,75.45 v75.94,75.33 75.83,75.44 75.83,76.25 76.11,76.52 77.11,76.52 78.52,77.94 83.66,77.94 84.3,77.3 84.3,77.28 84.61,76.98 85.79,76.98 v85.91,77.09
NETU5_23  (via drill 0.3 pad 0.6)
  Top 0.15: v75.77,74.55 75.68,74.55 76.35,73.88 | U7.5 89.08,80.25 88,79.18
  Bottom 0.15: v75.77,74.55 76.72,74.55 78.47,76.31 78.47,76.62 78.9,77.04 83.28,77.04 83.4,76.92 83.4,76.91 84.34,75.97 86.87,75.97 88.03,77.12 v88.03,79.15
NRST  (via drill 0.3 pad 0.6)
  Top 0.15: v75.19,75.11 75.19,75.32 75.42,75.55 75.42,75.83 76.13,76.53 76.81,76.53 78.16,77.88 78.16,79.43 79.26,80.54 Q3.4 | v80.3,65.8 81.4,65.8 R24.2 81.73,64.77 C25.2 | 78.47,70 78.47,69.9 v79.15,69.22
  Bottom 0.15: v75.19,75.11 75.24,75.06 75.24,72.83 75.55,72.53 75.84,72.53 v79.15,69.22 80.3,68.07 v80.3,65.8
OUT1
  Top 0.15: U3.9 85.02,95.3 84.57,94.86 83.77,94.86 83.58,95.04 83.58,95.06 83.28,95.37 82.84,95.37 82.77,95.3 82.28,95.3 81.88,95.71 73.54,95.71 72.59,94.77 72.59,93.86 71.19,92.45
PCB_N
  Top 0.3: 85.14,37.37 85.14,42.04 85.65,42.55 85.65,46.73 IC2.1
PCB_P
  Top 0.3: 82.86,37.37 82.86,42.04 82.35,42.55 82.35,46.73 IC2.3
ROM  (via drill 0.3 pad 0.6)
  Top 0.15: v89.28,74.35 89.28,73.56 89.28,73.55 88.97,73.24 88.96,73.24 88.81,73.09 87.45,73.09 87,73.55 83.08,73.55 82,72.47 | v86.82,97.44 86.82,97.87 85.58,99.11 85.58,103.76 v84.08,105.26 | v86.82,95.48 86.82,94.42 86.82,94.41 87.83,93.39 v87.83,93.35 | v86.03,111.08 85.45,111.66 82.91,111.66 80.47,114.1 80.47,115.47 81.6,116.6
  Bottom 0.15: v86.82,95.48 v86.82,97.44 | v87.83,93.35 87.82,93.35 87.27,92.8 87.24,92.8 87.02,92.58 87.02,84.66 87.76,83.93 87.76,83.11 90.06,80.81 90.06,76.61 89.28,75.84 v89.28,74.35 | v84.08,105.26 84.08,109.07 86.06,111.05 v86.03,111.08
SCL  (via drill 0.3 pad 0.6)
  Top 0.15: 84.36,90.55 v84.36,90.66 | v82.17,88.12 82.04,88.12 82.2,87.96 82.2,87.77 81.38,86.95 81.38,85.35 81.25,85.22 81.25,83.88 81.38,83.75 81.38,82.3 80.6,81.51 80.6,80.24 79.64,79.28 79.64,77.92 79.35,77.63 78.52,77.63 77.52,76.63 77.52,75.54 77.76,75.3 | 88.83,93.54 88.36,94.01 87.64,94.01 87.15,94.5 87.15,94.87 87.67,95.38 v87.67,95.47 | 85.42,95.81 85.42,95.22 84.75,94.56 83.35,94.56 v83.06,94.85 83.01,94.9 82.27,94.9 81.75,95.41 74.17,95.41 73.58,94.82 v73.41,94.82 | 84.36,90.55 84.32,90.51 84.32,92.82 83.46,93.69 83.46,94.52 | 84.36,90.43 84.36,90.55 | v73.41,94.82 73.41,94.97 73.26,94.82 v73.41,94.82
  Bottom 0.15: v84.36,90.66 84.36,89.77 84.84,89.28 84.84,87.94 84.22,87.31 83.26,87.31 82.72,87.85 82.44,87.85 v82.17,88.12 | 72.17,87.47 73.1,88.39 73.1,89.75 73.62,90.27 73.62,94.27 73.33,94.56 73.46,94.68 73.41,94.73 v73.41,94.82 | v83.06,94.85 85.37,94.85 85.71,95.19 86.37,95.19 86.6,94.96 87.04,94.96 87.27,95.19 87.48,95.19 87.63,95.35 87.58,95.4 v87.65,95.47 v87.67,95.47
SDA  (via drill 0.3 pad 0.6)
  Top 0.15: v83.77,91.13 83.77,91.69 83.8,91.72 v83.8,92.48 83.8,92.92 83.31,93.41 83.3,93.41 82.83,93.88 82.83,93.83 82.53,93.83 82.53,94.21 81.63,95.11 74.47,95.11 73.43,94.08 73.43,91.71 71.68,89.96 | v82.5,87.33 82.37,87.2 82.11,87.2 81.68,86.78 81.68,85.23 81.55,85.09 81.55,84.01 81.68,83.87 81.68,82.17 80.9,81.39 80.9,80.12 79.94,79.16 79.94,77.8 79.47,77.33 78.64,77.33 77.92,76.61 77.92,75.84 78.12,75.65 | v87.76,94.72 88.14,94.34 89.42,94.34 90.22,93.54 | v85.93,94.67 85.93,94.57 85.82,94.68 85.82,95.81
  Bottom 0.15: 83.84,91.13 83.92,91.05 | v83.77,91.13 83.84,91.13 | v82.5,87.33 82.82,87.01 84.34,87.01 85.14,87.81 85.14,90.78 84.74,91.18 83.79,91.18 83.84,91.13 | v87.76,94.72 87.7,94.66 86.48,94.66 86.47,94.67 v85.93,94.67 85.93,94.57 83.8,92.43 v83.8,92.48
SER_N  (via drill 0.3 pad 0.6)
  Top 0.15: v81.71,91.32 81.6,91.43 80.15,91.43 79.69,91.89 79.28,91.89 79.28,91.88 | v93.91,89.67 95.49,88.08 SW2.1
  Bottom 0.15: v81.71,91.32 81.71,91.34 82.32,91.95 83.42,91.95 83.43,91.96 84.11,91.96 86.33,94.18 89.09,94.18 91.58,91.69 91.58,90.28 91.89,89.98 93.59,89.98 v93.91,89.67
SER_P  (via drill 0.3 pad 0.6)
  Top 0.15: v82.6,88.75 82.58,88.75 82.53,88.7 | 82.5,88.67 82.53,88.7 | 82.53,88.7 82.25,88.7 81.71,89.23 80.42,89.23 80.14,89.51 80.14,90.94 79.7,91.38 79.28,91.38
  Bottom 0.15: v82.6,88.75 82.6,90.86 82.64,90.86 83.42,91.64 83.53,91.64 83.56,91.66 83.99,91.66 84.01,91.64 84.3,91.64 84.62,91.96 84.62,91.97 86.53,93.87 88.97,93.87 91.28,91.56 91.28,90.16 91.76,89.68 92.22,89.68 92.96,88.93 SW2.6
SW_N  (via drill 0.3 pad 0.6)
  Top 0.15: v84.95,43.7 IC2.6
  Bottom 0.15: v84.95,43.7 84.95,50.41 84.15,51.21 84.15,62.56 83.02,63.69 83.02,67.91 84.24,69.12 86.98,69.12 88.03,70.17 88.03,71.02 88.2,71.19 90.34,71.19 92.91,73.76 92.91,80.73 93.61,81.43 93.61,87.14 94.94,88.47 94.94,90.05 95.44,90.54 SW2.2
SW_P  (via drill 0.3 pad 0.6)
  Top 0.15: v83.05,43.68 IC2.4
  Bottom 0.15: v83.05,43.68 83.05,50.46 83.85,51.26 83.85,62.44 82.72,63.57 82.72,68.03 84.11,69.42 86.86,69.42 87.72,70.29 87.72,71.14 88.07,71.49 90.21,71.49 92.61,73.89 92.61,80.85 93.31,81.55 93.31,87.27 94.64,88.6 94.64,90.05 93.54,91.15 SW2.5
USB_N  (via drill 0.3 pad 0.6)
  Top 0.15: U1.6 70.74,176.89 v70.94,176.69 | SW2.3 96.42,92.36 92.92,92.36 91.58,91.02 91.58,90.28 91.67,90.19 91.67,86.01 92.99,84.69 92.99,83.25 92.56,82.83 90.53,82.83 89.54,83.83 88.86,83.83 88.44,83.41 88.44,81.42 88,80.97 v88,79.93 | 80.24,75.3 80.46,75.53 80.75,75.53 83.37,78.15 83.6,78.15 | 83.6,78.15 83.58,78.17 83.58,78.45 83.58,78.46 83.58,78.89 83.58,78.9 R20.1 84.08,79.63 84.53,80.07 v84.53,79.9 | 83.6,78.15 84.34,78.15 84.35,78.16 86.11,78.16
  Bottom 0.15: v70.94,176.69 71,176.64 71.45,176.64 75.89,172.2 75.89,152.79 78.18,150.5 78.18,146.4 76.41,144.63 76.41,135.81 75.71,135.11 75.71,132.87 77.23,131.34 77.23,131.2 77.23,131.19 77.23,130.37 77,130.15 77,123.73 76.58,123.31 76.58,120.75 75.24,119.41 75.24,118.62 75.88,117.98 75.88,117.73 75.85,117.7 75.85,117.3 75.86,117.29 75.86,116.73 76.03,116.56 76.03,101.07 77.12,99.97 77.12,94.35 78.22,93.25 78.68,92.8 78.68,88.46 79.11,88.03 79.11,86.8 81.33,84.58 81.33,83.49 83.99,80.83 84.25,80.57 84.53,80.3 84.53,80.25 | v88,79.93 88,79.91 87.78,79.69 87.78,79.64 87.5,79.37 87.5,78.94 87.5,78.93 86.73,78.15 v85.88,78.15 85.88,78.14 | 84.51,80.27 84.53,80.25 | v84.53,79.9 84.53,80.25
USB_P  (via drill 0.3 pad 0.6)
  Top 0.15: v75.76,73.05 75.76,73.19 75.71,73.24 76,73.53 | v71.76,177.12 71.75,177.12 U1.5 | v92.1,90.5 91.97,90.37 91.97,86.14 93.29,84.82 93.29,83.13 92.69,82.53 90.4,82.53 89.69,81.82 89.69,80.44 | 89.69,80.44 89.7,80.45 | 87.28,79.76 87.33,79.71 | 87.33,79.71 87.5,79.54 87.5,78.94 87.81,78.63 88.24,78.63 88.55,78.94 88.55,79.3 89.69,80.44 | v83.05,76.08 83.42,76.08 v84.84,77.49 | v87.25,79.88 87.41,79.88 87.45,79.84 87.33,79.71
  Bottom 0.15: v71.76,177.12 71.76,176.94 71.67,176.85 76.19,172.32 76.19,152.92 78.48,150.62 78.48,146.28 76.71,144.5 76.71,135.68 76.01,134.98 76.01,132.99 77.53,131.47 77.53,131 77.53,130.99 77.53,130.25 77.3,130.02 77.3,123.6 76.88,123.19 76.88,120.63 75.54,119.29 75.54,118.74 76.17,118.11 76.17,117.6 76.15,117.58 76.16,117.57 76.16,116.85 76.33,116.68 76.33,101.19 77.42,100.1 77.42,94.47 78.34,93.55 78.35,93.55 78.98,92.92 78.98,88.58 79.41,88.15 79.41,86.92 81.63,84.7 81.63,83.62 85.05,80.19 85.05,79.76 | SW2.4 92.1,91.79 v92.1,90.5 | 87.45,79.89 87.45,80.15 87.47,80.17 87.47,80.84 87.17,81.15 86.73,81.15 86.51,81.15 85.05,79.69 85.05,79.68 84.66,79.3 84.66,79.2 84.62,79.17 84.62,78.48 84.66,78.44 84.66,77.66 v84.83,77.5 | v83.05,76.08 82.33,76.08 81.97,76.44 79.87,76.44 79.26,75.83 78.54,75.83 v75.76,73.05 75.76,72.87 76,73.11
VBAT  (via drill 0.3 pad 0.6, 0.5 pad 1)
  Top 0.15: v81.13,90.81 80.94,90.81 81.21,90.54 81.21,90.01
  Top 0.2: D1.2 85.33,178.69 86.08,178.69 86.53,179.15 86.53,180.69 87.26,181.42 89.81,181.42 v90.15,181.08 | 79.83,130 82,130
  Top 0.3: 92.52,132.41 93.45,132.41 v93.45,133.41 | 78.25,110.21 78.39,110.07 | 90.43,179.72 90.46,179.76
  Top 0.5: M1.1 90.43,179.67 90.46,179.71 90.46,179.76 90.46,180.76 v90.15,181.08 | 92.82,98.39 94,98.39 v94.8,97.59 | 92.82,96.49 93.69,96.49 v94.8,97.59 | v94.8,97.59 95.42,97.59 96.05,98.22
  Top 0.8: 73,117 73,114.86 75.03,112.83 76.38,112.83 78.25,110.96 78.25,110.21 | 79.83,129.96 79.12,129.25 79.12,129.03 76.09,129.03 74.66,130.47 | 78.39,108.45 79.1,109.16 79.1,109.2 | v79.53,112.83 79.53,111.03 78.4,109.9 79.1,109.2 | v97.79,131.17 97.79,132.38 97.83,132.41 | v92.1,157 92.1,154.61 97.78,148.94 97.78,147.49 97.78,147.48 97.78,132.42 97.78,132.41 | 82,108 80.3,108 79.1,109.2 | v90.8,112.1 91.4,112.1 95,115.7 95,117 | 96.32,107.32 94.63,109.01 94.63,111.24 95.2,111.81 v95.18,111.81
  Bottom 0.15: v81.13,90.81 81.13,93.66 85.43,97.96 87.04,97.96 87.41,97.59 v94.8,97.59
  Bottom 0.3: v97.79,131.17 97.08,131.88 94.41,131.88 93.45,132.85 v93.45,133.41 | v90.15,181.08 89.74,181.49 89.74,184.36 88.95,185.15 79.01,185.15 LED6.1
  Bottom 0.8: 79.89,113.19 79.89,113.48 79.97,113.57 79.97,128.19 v79.63,128.53 | v79.53,112.83 79.89,113.19 | v97.79,131.17 96.28,129.66 96.28,112.92 v95.18,111.81 | v95.18,111.81 91.09,111.81 v90.8,112.1 80.97,112.1 79.89,113.19 | v92.1,157 92.13,157.03 92.13,179.1 v90.15,181.08 | v95.18,111.81 95.18,97.97 v94.8,97.59
VBUS  (via drill 0.4 pad 0.8, 0.5 pad 1)
  Top 0.2: 78.3,94.28 78.81,94.79 81.39,94.79 81.8,94.37 81.8,93.26 81.56,93.02 80.34,93.02 80.2,92.88 79.28,92.88 | U8.4 75.34,124.34 LED5.3 LED5.1 | v74.25,94.01 74.59,94.01 75.22,94.64 75.97,94.64 76.72,94.64 77.95,94.64 78.3,94.3 78.3,94.28 | 78.3,93.82 78.3,94.28
  Top 0.7: 69.8,131.7 69.9,131.6 v69.9,130.35 70.02,130.47 U8.8 | U8.4 74.66,123.37 v74.67,123.36
  Top 0.8: 83.2,61.77 82.55,61.13 v82.55,60.66 84,59.21 84,55.2
  Bottom 0.7: v82.55,60.66 75.42,67.79 75.11,68.41 73.89,74.5 73.89,76.31 75.24,77.65 76.32,77.65 76.79,78.12 76.79,81.23 73.05,84.97 72.67,84.97 72.67,85.54 73.65,86.53 73.65,86.82 73.67,86.84 73.67,87.78 73.67,89.51 74.25,90.08 v74.25,94.01 74.25,94.47 74.65,94.87 74.65,98.49 74.64,98.5 74.64,99.17 74.8,99.32 74.68,99.44 74.68,115.13 74.69,115.14 74.69,115.8 74.68,115.82 74.68,117.52 74.07,118.13 74.07,122.76 v74.67,123.36 73.27,123.36 69.9,126.72 v69.9,130.35
VDD3  (via drill 0.3 pad 0.6)
  Top 0.15: v68.78,178.92 70.09,178.92 69.74,178.56 69.74,177.63 | 88.05,96.74 87.14,96.74 87.12,96.73 86.02,96.73 | v75.92,71.34 75.85,71.26 74.52,72.59 74.52,74.15 74.06,74.61 74.06,75.32 73.85,75.53 73.85,77.57 74.58,78.3 | 69.48,104.81 70.26,105.59 71.5,105.59 72.04,105.05 72.04,103.33 72.95,102.42 | 87.66,122.33 87.33,122.33 86.4,121.4 | v82.7,182.17 82.83,182.17 83.63,182.97 83.63,183.44 | 85.91,183.25 85.79,183.14 83.66,183.14 | v77.14,69.83 76.94,69.83 76.92,69.81
  Top 0.2: 80.4,69.07 80.4,68.93 79.63,68.17 79.03,68.17 78.4,68.8 77.62,68.8 77.25,69.17 77.25,70.19 77.76,70.7 77.41,71.06 | 81.3,74.24 81.56,74.5 87.1,74.5 87.81,75.21 | 82.87,68.23 81.7,69.4 80.87,69.4 80.53,69.07 | 82.87,67.27 82.87,68.23 | 80.24,70.7 80.59,71.06 81.18,70.46 82.5,70.46 83.16,70.46 83.86,69.77 83.86,69.22 82.87,68.23 | 79.53,70 80.4,69.12
  Top 0.25: 83.96,88.74 83.96,89.63 83.72,89.87 83.66,89.87 83.64,89.85 83.63,89.86 83.28,89.86 83.28,89.85 83.26,89.87 82.53,89.87
  Top 0.3: 91.09,74.16 92.56,74.16 | 83.96,88.74 84.69,88.01 v86.06,88.01 86.98,88.01 87.15,87.85 87.15,87.9 88.13,88.88 90.17,88.88 91.16,89.87 91.16,91.29 92.64,92.77 92.64,94.15 91.64,95.14 | 85.85,82.75 85.27,82.75 85.27,82.74 | 85.85,82.75 86.54,82.75 | 85.85,82.75 85.85,83.27 v85.88,83.29 | 82.5,70.46 82.53,70.49 82.53,71.16 83.94,72.57 86.59,72.57 87.05,72.11 90.1,72.11 90.36,71.85 91.6,71.85 91.77,72.02 91.77,73.53 92.31,74.06 | v87.81,74.42 87.81,75.21 87.81,76.89 86.48,78.22 86.48,78.31 86.47,78.33 86.47,78.4 86.05,78.83 86.05,79.07 86.05,79.08 86.05,81.96 85.27,82.74 | 78.47,76 78.45,76 78.45,76.6 78.8,76.95 79.63,76.95 80.31,77.64 80.31,79 80.94,79.63 81.98,79.63 81.98,81.13 82.93,82.08 84.61,82.08 85.27,82.74
  Top 0.4: v73.26,107.95 75.54,107.95 75.85,107.65 77.74,107.65 79.03,107.65 79.2,107.65 80.19,106.66 v80.19,106.61
  Top 0.5: 89.7,131.02 89.68,131.04 89.68,133.39 88.7,134.37 88.7,145.01 91.03,145.01 91.7,145.67 v91.72,145.67 | 89.7,131.02 88.69,130 88.34,130 87.48,129.14 87.48,122.51 87.66,122.33 89.65,120.34 89.65,119.91 91.59,117.96 91.59,115.62 87.33,111.36 v87.33,110.95 | 88.83,95.14 91.64,95.14 91.64,95.97 91.12,96.49 89.05,96.49 88.83,96.71 88.08,96.71 | 88.05,96.74 87.72,97.07 87.72,98.5 87.43,98.78 v87.43,99.44 | 71.25,101.47 71.25,100.66 v71.5,100.41 | 71.25,101.47 71.25,101.56 72.09,101.56 72.95,102.42 | 89.7,131.02 90.92,131.02 | 69.7,99.92 71.25,101.47
  Bottom 0.15: v77.14,69.83 77.14,70.12 v75.92,71.34
  Bottom 0.3: v90.66,74.3 90.66,74.42 89.24,73.01 88.25,73.01 87.8,73.46 v87.8,74.42 v87.81,74.42 | v82.7,182.17 82.07,181.54 78.13,181.54 | v85.88,83.29 85.72,83.29 85.88,83.45 85.88,85.27 86.06,85.44 v86.06,88.01
  Bottom 0.5: v80.19,106.61 80.88,106.61 84.86,102.62 84.86,101.35 86.77,99.44 v87.43,99.44 87.43,110.85 v87.33,110.95 | v68.78,178.92 75.52,178.92 | 75.52,178.92 76.66,177.77 76.66,153.24 81.97,147.93 89.46,147.93 v91.72,145.67 | 75.52,178.92 78.13,181.54 | v71.5,100.41 71.5,104.25 69.94,105.81 69.94,107 70.89,107.95 v73.26,107.95
VIBRATOR  (via drill 0.3 pad 0.6)
  Top 0.15: v79.02,104.04 78.97,104.04 78.67,103.74 78.67,101.32 79.17,100.81 80.86,100.81 82.95,98.72 84.22,98.72 84.62,98.33 U3.4 84.62,97.54 | Q1.1 79.77,173.96 79.22,173.41 78.26,173.41 76.43,171.58 76.43,157.31 72.67,153.55 72.67,138.56 v76.86,134.37
  Bottom 0.15: v79.02,104.04 79.02,104.2 78.25,104.97 78.25,105.85 78.25,116.91 78.59,117.26 78.59,125.47 78.89,125.77 78.89,132.44 77.73,133.61 77.55,133.78 76.96,134.37 v76.86,134.37
VUSB  (via drill 0.3 pad 0.6, 0.5 pad 1)
  Top 0.2: v84,43.66 IC2.5
  Top 0.8: v84,50.22 R31.1 | v87.78,43.99 87.81,44.02 87.81,37.11
  Bottom 0.8: v84,50.22 v84,43.66 84,42.98 84.48,42.5 86.29,42.5 v87.78,43.99
WS2813  (via drill 0.3 pad 0.6)
  Top 0.15: v76.15,119.07 72.22,119.07 71.5,119.79 71.5,121 | v77.07,120.07 77.07,120.39 84.51,127.83 84.51,128.5 | v79.05,76.36 79.4,76 79.53,76 | 84.51,128.5 86,128.5 | 84.51,128.5 84.51,131.32 84.69,131.5 86,131.5
  Bottom 0.15: v79.05,76.36 79.43,76.74 83.15,76.74 84.22,75.67 86.99,75.67 88.55,77.22 88.55,80.19 87.29,81.45 84.22,81.45 81.93,83.74 81.93,84.83 79.71,87.05 79.71,88.27 79.28,88.71 79.28,93.05 78.47,93.85 77.81,94.5 77.81,101.26 76.75,102.32 76.75,105.23 76.75,117.11 76.59,117.27 76.59,118.26 76.34,118.51 76.34,118.89 v76.15,119.07 76.11,119.11 v77.07,120.07
WS_EXPD
  Top 0.15: 70.2,97.43 73.08,100.31 74.66,100.31 76.04,101.69 76.04,103.4 77.93,105.29 80.79,105.29 82,106.5

## Text on the board
tPlace: + | 1A | Bad | Board
bPlace: + DO NOT SHORT: FIRE INSIDE - | gulas.ch | GND | 3V | LED | AIN | DOUT | SDA | SCL | VUSB | RX | TX | USB | PWR | Jan Henrik H. | Moritz H. | Niklas F.
tStop: Gulasch | Push | Notifier